# EAGLE board led-er-v3 (EAGLE 7.5.0)
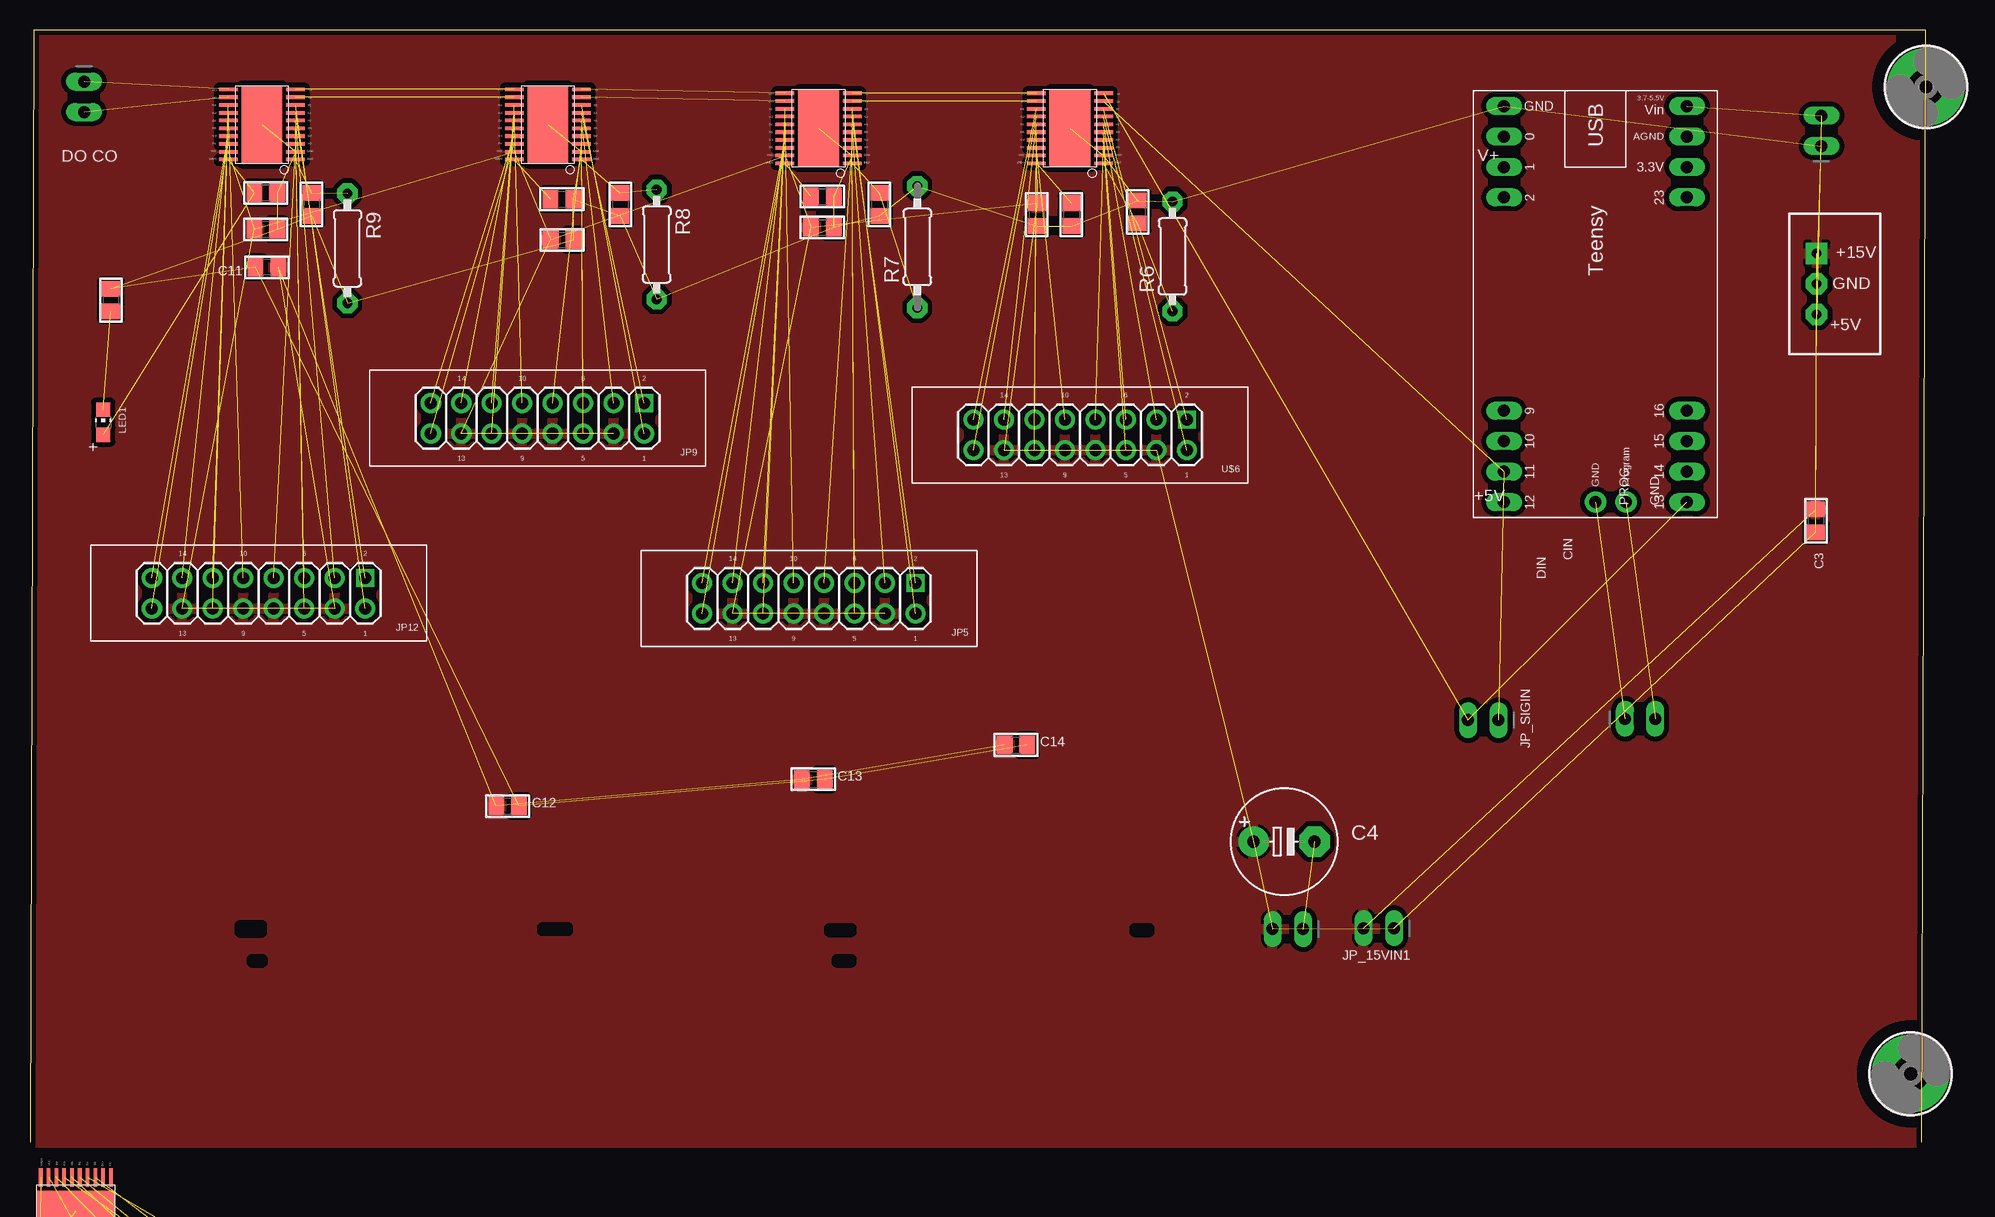
[diagram p0: board, top side]
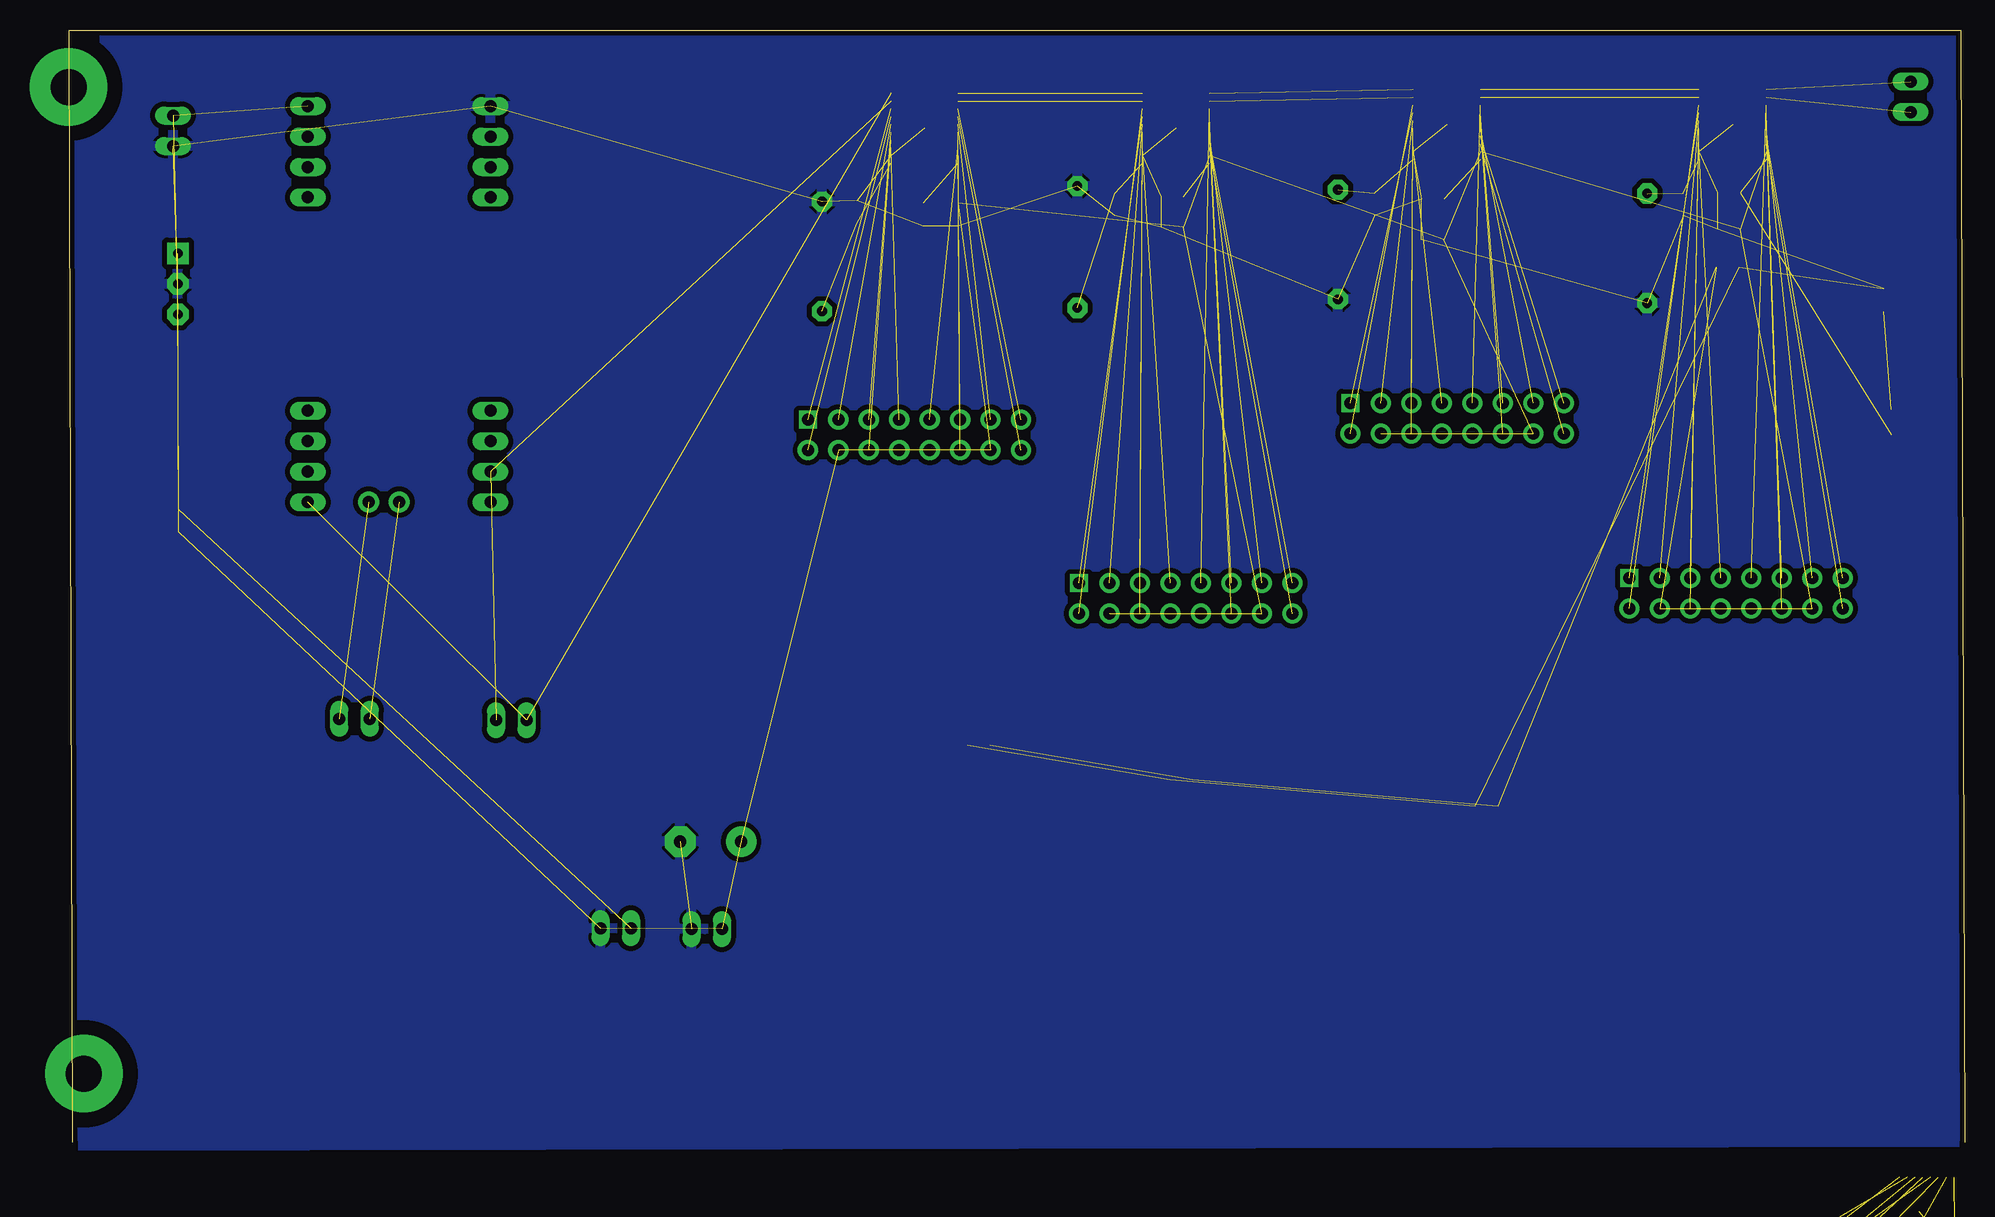
[diagram p1: board, bottom side, seen from below]

Size 158.01 x 92.73 mm. Coordinates in mm from the lower left corner, seen from the top.
Outline: 157.69,0 158,92.73 0.32,92.73 0,0
Copper layers (1*16): Top 0.0356mm / dielectric 1.5011mm / Bottom 0.0356mm
Design rules "LaenPCBOrder": minimum track width 6mil, minimum drill 13mil, track to track 6mil, track to pad 6mil, pad to pad 6mil, via to via 6mil, smd to smd 6mil, copper to edge 15mil, drill to drill 6mil, minimum pad ring 7mil, minimum via ring 7mil, stop-mask expansion 3mil, vias tented up to drill 0mil, thermal gap 10mil
tRestrict: area 17.5,17.5 to 19.4,18.1; area 18.5,15 to 19.4,15.3; area 42.6,17.6 to 44.9,17.9; area 66.6,17.5 to 68.5,17.8; area 67.2,15 to 68.5,15.3; area 92.1,17.5 to 93.3,17.8

## Footprints (pad centres in the part's own frame; a part is rotated, then mirrored left to right if it is on the bottom)
0805 = smd 1.3 x 1.5: 1 -0.95,0; 2 0.95,0
E5-8,5 = drill 1.016 pad 2.54: + -2.54,0 | drill 1.016 pad 2.54 octagon: - 2.54,0
HTSSOP20DAP = smd 0.3 x 1.55: 1 -2.925,-2.8; 2 -2.275,-2.8; 3 -1.625,-2.8; 4 -0.975,-2.8; 5 -0.325,-2.8; 6 0.325,-2.8; 7 0.975,-2.8; 8 1.625,-2.8; 9 2.275,-2.8; 10 2.925,-2.8; 11 2.925,2.8; 12 2.275,2.8; 13 1.625,2.8; 14 0.975,2.8; 15 0.325,2.8; 16 -0.325,2.8; 17 -0.975,2.8; 18 -1.625,2.8; 19 -2.275,2.8; 20 -2.925,2.8 | smd 6.5 x 3.4: EXP 0,0
2X08_RIBBON = drill 1 pad 1.676: P1 -8.89,1.27; P3 -6.35,1.27; P4 -6.35,-1.27; P5 -3.81,1.27; P6 -3.81,-1.27; P7 -1.27,1.27; P8 -1.27,-1.27; P9 1.27,1.27; P10 1.27,-1.27; P11 3.81,1.27; P12 3.81,-1.27; P13 6.35,1.27; P14 6.35,-1.27; P15 8.89,1.27; P16 8.89,-1.27 | drill 1 square: P2 -8.89,-1.27
1X02_OVAL = drill 1 long: 1 -1.27,0; 2 1.27,0
CHIP-LED0805 = smd 1.2 x 1.2: A 0,-1.05; C 0,1.05
0207/9 = drill 0.813 pad 1.676 octagon: 1 -4.572,0; 2 4.572,0
0207/10 = drill 0.813 pad 1.676 octagon: 1 -5.08,0; 2 5.08,0
TSR-1 = drill 0.8 pad 1.8 square: 1 -2.54,-1.5 | drill 0.8 pad 1.8 octagon: 2 0,-1.5; 3 2.54,-1.5
MOUNTINGHOLE_3.0_PLATED = drill 3 pad 6.452: P$1 0,0
TEENSY_LEDER = drill 1 pad 1.422 long: 0 12.7,7.62; 1 10.16,7.62; 2 7.62,7.62; 3.3V 10.16,-7.62; 9 -10.16,7.62; 10 -12.7,7.62; 11 -15.24,7.62; 12 -17.78,7.62; 13 -17.78,-7.62; 14 -15.24,-7.62; 15 -12.7,-7.62; 16 -10.16,-7.62; 23 7.62,-7.62; AGND 12.7,-7.62; GND 15.24,7.62; VIN 15.24,-7.62 | drill 1 pad 1.778: GND2 -17.78,0; PROG -17.78,-2.54

## Placement (x,y rotation side)
C1  10uF/16V  [0805]  86.81,77.34 270 top
C2  10uF/16V  [0805]  66.05,78.84 0 top
C3  10uF/16V  [0805]  148.86,51.81 270 top
C4  220uF+  [E5-8,5]  104.53,25.07 0 top
C5  1uF/50V  [0805]  83.92,77.34 270 top
C6  1uF/50V  [0805]  66.05,76.27 0 top
C7  10uF/16V  [0805]  44.34,78.63 0 top
C8  1uF/50V  [0805]  44.35,75.23 0 top
C9  10uF/16V  [0805]  19.66,79.16 0 top
C10  1uF/50V  [0805]  19.66,76.12 0 top
C11  10uF 25V  [0805]  19.75,72.94 180 top
C12  10uF 25V  [0805]  39.81,28.03 0 top
C13  10uF 25V  [0805]  65.3,30.26 0 top
C14  10uF 25V  [0805]  82.18,33.13 0 top
IC4  TLC59711  [HTSSOP20DAP]  19.34,84.85 90 top
JP5  HEADER-2X8-RIBBON  [2X08_RIBBON]  64.92,45.34 180 top
JP9  HEADER-2X8-RIBBON  [2X08_RIBBON]  42.3,60.37 180 top
JP12  HEADER-2X8-RIBBON  [2X08_RIBBON]  19.05,45.77 180 top
JP_5V  [1X02_OVAL]  149.32,84.32 90 top
JP_15VIN  [1X02_OVAL]  104.85,17.78 180 top
JP_15VIN1  [1X02_OVAL]  112.44,17.84 180 top
JP_PROG  [1X02_OVAL]  134.21,35.29 0 top
JP_SIGIN  [1X02_OVAL]  121.14,35.2 180 top
JP_SIGOUT  [1X02_OVAL]  4.5,87.15 270 top
LED1  Green  [CHIP-LED0805]  6.1,60.03 0 top
LED-ER1:C1  10uF/16V  [0805]  1.59,-27.07 0 top  (outside the outline)
LED-ER1:C5  1uF/50V  [0805]  1.59,-29.62 0 top  (outside the outline)
LED-ER1:C11  10uF 25V  [0805]  1.59,-24.53 0 top  (outside the outline)
LED-ER1:R3  22K  [0805]  1.59,-32.17 0 top  (outside the outline)
LED-ER1:R6  [0207/9]  5.41,-21.98 0 top  (outside the outline)
LED-ER1:TLC1  TLC59711  [HTSSOP20DAP]  3.82,-5.73 0 top
LED-ER1:U$6  HEADER-2X8-RIBBON  [2X08_RIBBON]  13.7,-14.65 0 top  (outside the outline)
R1  22K  [0805]  70.81,78.19 270 top
R2  470  [0805]  6.74,70.21 270 top
R3  22K  [0805]  92.33,77.56 90 top
R4  22K  [0805]  49.2,78.19 270 top
R5  22K  [0805]  23.46,78.19 270 top
R6  [0207/9]  95.24,73.86 90 top
R7  [0207/10]  73.96,74.65 90 top
R8  [0207/9]  52.24,74.85 270 top
R9  [0207/9]  26.46,74.53 270 top
TLC1  TLC59711  [HTSSOP20DAP]  86.69,84.53 90 top
TLC2  TLC59711  [HTSSOP20DAP]  65.73,84.53 90 top
TLC3  TLC59711  [HTSSOP20DAP]  43.17,84.85 90 top
TSR1-2450  TSR1-2450  [TSR-1]  150.43,71.56 270 top
U$1  MOUNTINGHOLE  [MOUNTINGHOLE_3.0_PLATED]  158.03,87.98 0 top
U$3  MOUNTINGHOLE  [MOUNTINGHOLE_3.0_PLATED]  156.76,5.72 0 top
U$5  TEENSY_LEDER  [TEENSY_LEDER]  130.49,71.15 90 top
U$6  HEADER-2X8-RIBBON  [2X08_RIBBON]  87.53,58.98 180 top

## Library data of the parts
C1-C3 C5-C14 JP_5V JP_15VIN JP_15VIN1 JP_PROG JP_SIGIN JP_SIGOUT LED-ER1:C1 LED-ER1:C5 LED-ER1:C11 LED-ER1:R3 R1-R5 U$1 U$3 = microbuilder
C4 IC4 LED1 LED-ER1:R6 LED-ER1:TLC1 R6-R9 TLC1-TLC3 = adafruit
JP5 JP9 JP12 LED-ER1:U$6 U$5 U$6 = Andrews
TSR1-2450 = SteelCaveRobotics-Power

## Nets
1SCKI: JP_SIGIN.2 TLC1.10 U$5.13
1SDTI: JP_SIGIN.1 TLC1.9 U$5.11
2SCKO: TLC1.11 TLC2.10
2SDTO: TLC1.12 TLC2.9
3SCKO: TLC2.11 TLC3.10
3SDTO: TLC2.12 TLC3.9
4SCKO: IC4.10 TLC3.11
4SDTO: IC4.9 TLC3.12
+15V: C3.1 C4.+ C5.1 C6.1 C8.1 C10.1 C11.1 C12.1 C13.1 C14.1 IC4.19 JP5.P3 JP5.P7 JP5.P9 JP5.P13 JP9.P3 JP9.P7 JP9.P9 JP9.P13 JP12.P3 JP12.P7 JP12.P9 JP12.P13 JP_15VIN1.2 JP_15VIN.2 TLC1.19 TLC2.19 TLC3.19 TSR1-2450.1 U$6.P3 U$6.P7 U$6.P9 U$6.P13
GND: C1.2 C2.2 C3.2 C4.- C5.2 C6.2 C7.2 C8.2 C9.2 C10.2 C11.2 C12.2 C13.2 C14.2 IC4.2 IC4.EXP JP_5V.1 JP_15VIN1.1 JP_15VIN.1 R1.2 R2.1 R3.2 R4.2 R5.2 R6.2 R7.2 R8.2 R9.2 TLC1.2 TLC1.EXP TLC2.2 TLC2.EXP TLC3.2 TLC3.EXP TSR1-2450.2 U$5.GND
JP1: JP_5V.2 TSR1-2450.3 U$5.VIN
LED-ER1:1SCKI: LED-ER1:TLC1.10
LED-ER1:1SDTI: LED-ER1:TLC1.9
LED-ER1:2SCKO: LED-ER1:TLC1.11
LED-ER1:2SDTO: LED-ER1:TLC1.12
LED-ER1:+15V: LED-ER1:C5.1 LED-ER1:C11.1 LED-ER1:TLC1.19 LED-ER1:U$6.P3 LED-ER1:U$6.P7 LED-ER1:U$6.P9 LED-ER1:U$6.P13
LED-ER1:GND: LED-ER1:C1.2 LED-ER1:C5.2 LED-ER1:C11.2 LED-ER1:R3.2 LED-ER1:R6.2 LED-ER1:TLC1.2 LED-ER1:TLC1.EXP
LED-ER1:N$2: LED-ER1:R3.1 LED-ER1:R6.1 LED-ER1:TLC1.1
LED-ER1:N$3: LED-ER1:TLC1.8 LED-ER1:U$6.P2
LED-ER1:N$4: LED-ER1:TLC1.7 LED-ER1:U$6.P1
LED-ER1:N$5: LED-ER1:TLC1.6 LED-ER1:U$6.P4
LED-ER1:N$6: LED-ER1:TLC1.5 LED-ER1:U$6.P6
LED-ER1:N$11: LED-ER1:TLC1.4 LED-ER1:U$6.P5
LED-ER1:N$12: LED-ER1:TLC1.3 LED-ER1:U$6.P8
LED-ER1:N$13: LED-ER1:TLC1.15 LED-ER1:U$6.P14
LED-ER1:N$14: LED-ER1:TLC1.18 LED-ER1:U$6.P10
LED-ER1:N$32: LED-ER1:TLC1.17 LED-ER1:U$6.P11
LED-ER1:N$33: LED-ER1:TLC1.16 LED-ER1:U$6.P12
LED-ER1:N$34: LED-ER1:TLC1.14 LED-ER1:U$6.P15
LED-ER1:N$35: LED-ER1:TLC1.13 LED-ER1:U$6.P16
LED-ER1:N$56: LED-ER1:C1.1 LED-ER1:TLC1.20
N$1: LED1.C R2.2
N$2: R3.1 R6.1 TLC1.1
N$3: TLC1.8 U$6.P2
N$4: TLC1.7 U$6.P1
N$5: TLC1.6 U$6.P4
N$6: TLC1.5 U$6.P6
N$7: JP5.P2 TLC2.7
N$8: JP5.P4 TLC2.6
N$9: JP5.P5 TLC2.5
N$10: JP5.P6 TLC2.4
N$11: TLC1.4 U$6.P5
N$12: TLC1.3 U$6.P8
N$13: TLC1.15 U$6.P14
N$14: TLC1.18 U$6.P10
N$15: R1.1 R7.1 TLC2.1
N$16: JP9.P1 TLC3.8
N$17: JP5.P10 TLC2.13
N$18: JP9.P6 TLC3.4
N$19: IC4.7 JP12.P2
N$20: JP9.P2 TLC3.7
N$21: IC4.6 JP12.P4
N$22: JP9.P4 TLC3.6
N$23: JP5.P12 TLC2.14
N$24: JP5.P11 TLC2.15
N$25: JP5.P14 TLC2.16
N$26: JP5.P16 TLC2.17
N$27: JP5.P15 TLC2.18
N$28: R4.1 R8.1 TLC3.1
N$29: JP9.P12 TLC3.14
N$30: JP5.P1 TLC2.8
N$31: JP9.P10 TLC3.13
N$32: TLC1.17 U$6.P11
N$33: TLC1.16 U$6.P12
N$34: TLC1.14 U$6.P15
N$35: TLC1.13 U$6.P16
N$37: JP9.P11 TLC3.15
N$38: JP9.P14 TLC3.16
N$39: JP9.P16 TLC3.17
N$40: JP9.P15 TLC3.18
N$41: IC4.1 R5.1 R9.1
N$42: JP5.P8 TLC2.3
N$43: IC4.13 JP12.P10
N$44: JP9.P5 TLC3.5
N$49: IC4.14 JP12.P12
N$50: IC4.15 JP12.P11
N$51: IC4.16 JP12.P14
N$52: IC4.17 JP12.P16
N$53: IC4.18 JP12.P15
N$54: JP_PROG.1 U$5.GND2
N$55: JP_PROG.2 U$5.PROG
N$56: C1.1 TLC1.20
N$57: C7.1 TLC3.20
N$58: C2.1 TLC2.20
N$59: IC4.11 JP_SIGOUT.1
N$60: IC4.12 JP_SIGOUT.2
N$61: JP9.P8 TLC3.3
N$62: IC4.3 JP12.P8
N$71: IC4.4 JP12.P6
N$79: IC4.5 JP12.P5
N$80: IC4.8 JP12.P1
VCC: C9.1 IC4.20 LED1.A

## Tracks (layer width: path | path; a pad name or v marks a point on that pad's centre or on a via)
1SCKI  (2 unrouted)
1SDTI  (2 unrouted)
2SCKO  (1 unrouted)
2SDTO  (1 unrouted)
3SCKO  (1 unrouted)
3SDTO  (1 unrouted)
4SCKO  (1 unrouted)
4SDTO  (1 unrouted)
+15V  (32 unrouted)
  pour Top (isolate 0.406, rank 2): 0.32,92.74 0,0 157.38,0 157.7,92.74
GND  (35 unrouted)
  pour Bottom (isolate 0.406, rank 2): 0,93.06 0,0 157.7,-0.32 157.7,92.74
JP1  (2 unrouted)
LED-ER1:+15V  (6 unrouted)
LED-ER1:GND  (6 unrouted)
LED-ER1:N$2  (2 unrouted)
LED-ER1:N$3  (1 unrouted)
LED-ER1:N$4  (1 unrouted)
LED-ER1:N$5  (1 unrouted)
LED-ER1:N$6  (1 unrouted)
LED-ER1:N$11  (1 unrouted)
LED-ER1:N$12  (1 unrouted)
LED-ER1:N$13  (1 unrouted)
LED-ER1:N$14  (1 unrouted)
LED-ER1:N$32  (1 unrouted)
LED-ER1:N$33  (1 unrouted)
LED-ER1:N$34  (1 unrouted)
LED-ER1:N$35  (1 unrouted)
LED-ER1:N$56  (1 unrouted)
N$1  (1 unrouted)
N$2  (2 unrouted)
N$3  (1 unrouted)
N$4  (1 unrouted)
N$5  (1 unrouted)
N$6  (1 unrouted)
N$7  (1 unrouted)
N$8  (1 unrouted)
N$9  (1 unrouted)
N$10  (1 unrouted)
N$11  (1 unrouted)
N$12  (1 unrouted)
N$13  (1 unrouted)
N$14  (1 unrouted)
N$15  (2 unrouted)
N$16  (1 unrouted)
N$17  (1 unrouted)
N$18  (1 unrouted)
N$19  (1 unrouted)
N$20  (1 unrouted)
N$21  (1 unrouted)
N$22  (1 unrouted)
N$23  (1 unrouted)
N$24  (1 unrouted)
N$25  (1 unrouted)
N$26  (1 unrouted)
N$27  (1 unrouted)
N$28  (2 unrouted)
N$29  (1 unrouted)
N$30  (1 unrouted)
N$31  (1 unrouted)
N$32  (1 unrouted)
N$33  (1 unrouted)
N$34  (1 unrouted)
N$35  (1 unrouted)
N$37  (1 unrouted)
N$38  (1 unrouted)
N$39  (1 unrouted)
N$40  (1 unrouted)
N$41  (2 unrouted)
N$42  (1 unrouted)
N$43  (1 unrouted)
N$44  (1 unrouted)
N$49  (1 unrouted)
N$50  (1 unrouted)
N$51  (1 unrouted)
N$52  (1 unrouted)
N$53  (1 unrouted)
N$54  (1 unrouted)
N$55  (1 unrouted)
N$56  (1 unrouted)
N$57  (1 unrouted)
N$58  (1 unrouted)
N$59  (1 unrouted)
N$60  (1 unrouted)
N$61  (1 unrouted)
N$62  (1 unrouted)
N$71  (1 unrouted)
N$79  (1 unrouted)
N$80  (1 unrouted)
VCC  (2 unrouted)

## Text on the board
tPlace: DO | CO | V+ | +15V | GND | +5V | +5V | PROG | GND | CIN | DIN